# Altium PCB Insole_ver2.PcbDoc (part 3 of 3)
Units mil, origin at the board's own origin, x right, y up, seen from the top; angles counter-clockwise.
Board outline 8634.93 x 10258.5 mil, 2 copper layers (Top Layer, Bottom Layer); 507 components, 50 nets, 1329 pads, 253 vias.
Unrouted connection lines stored in the file: 728.
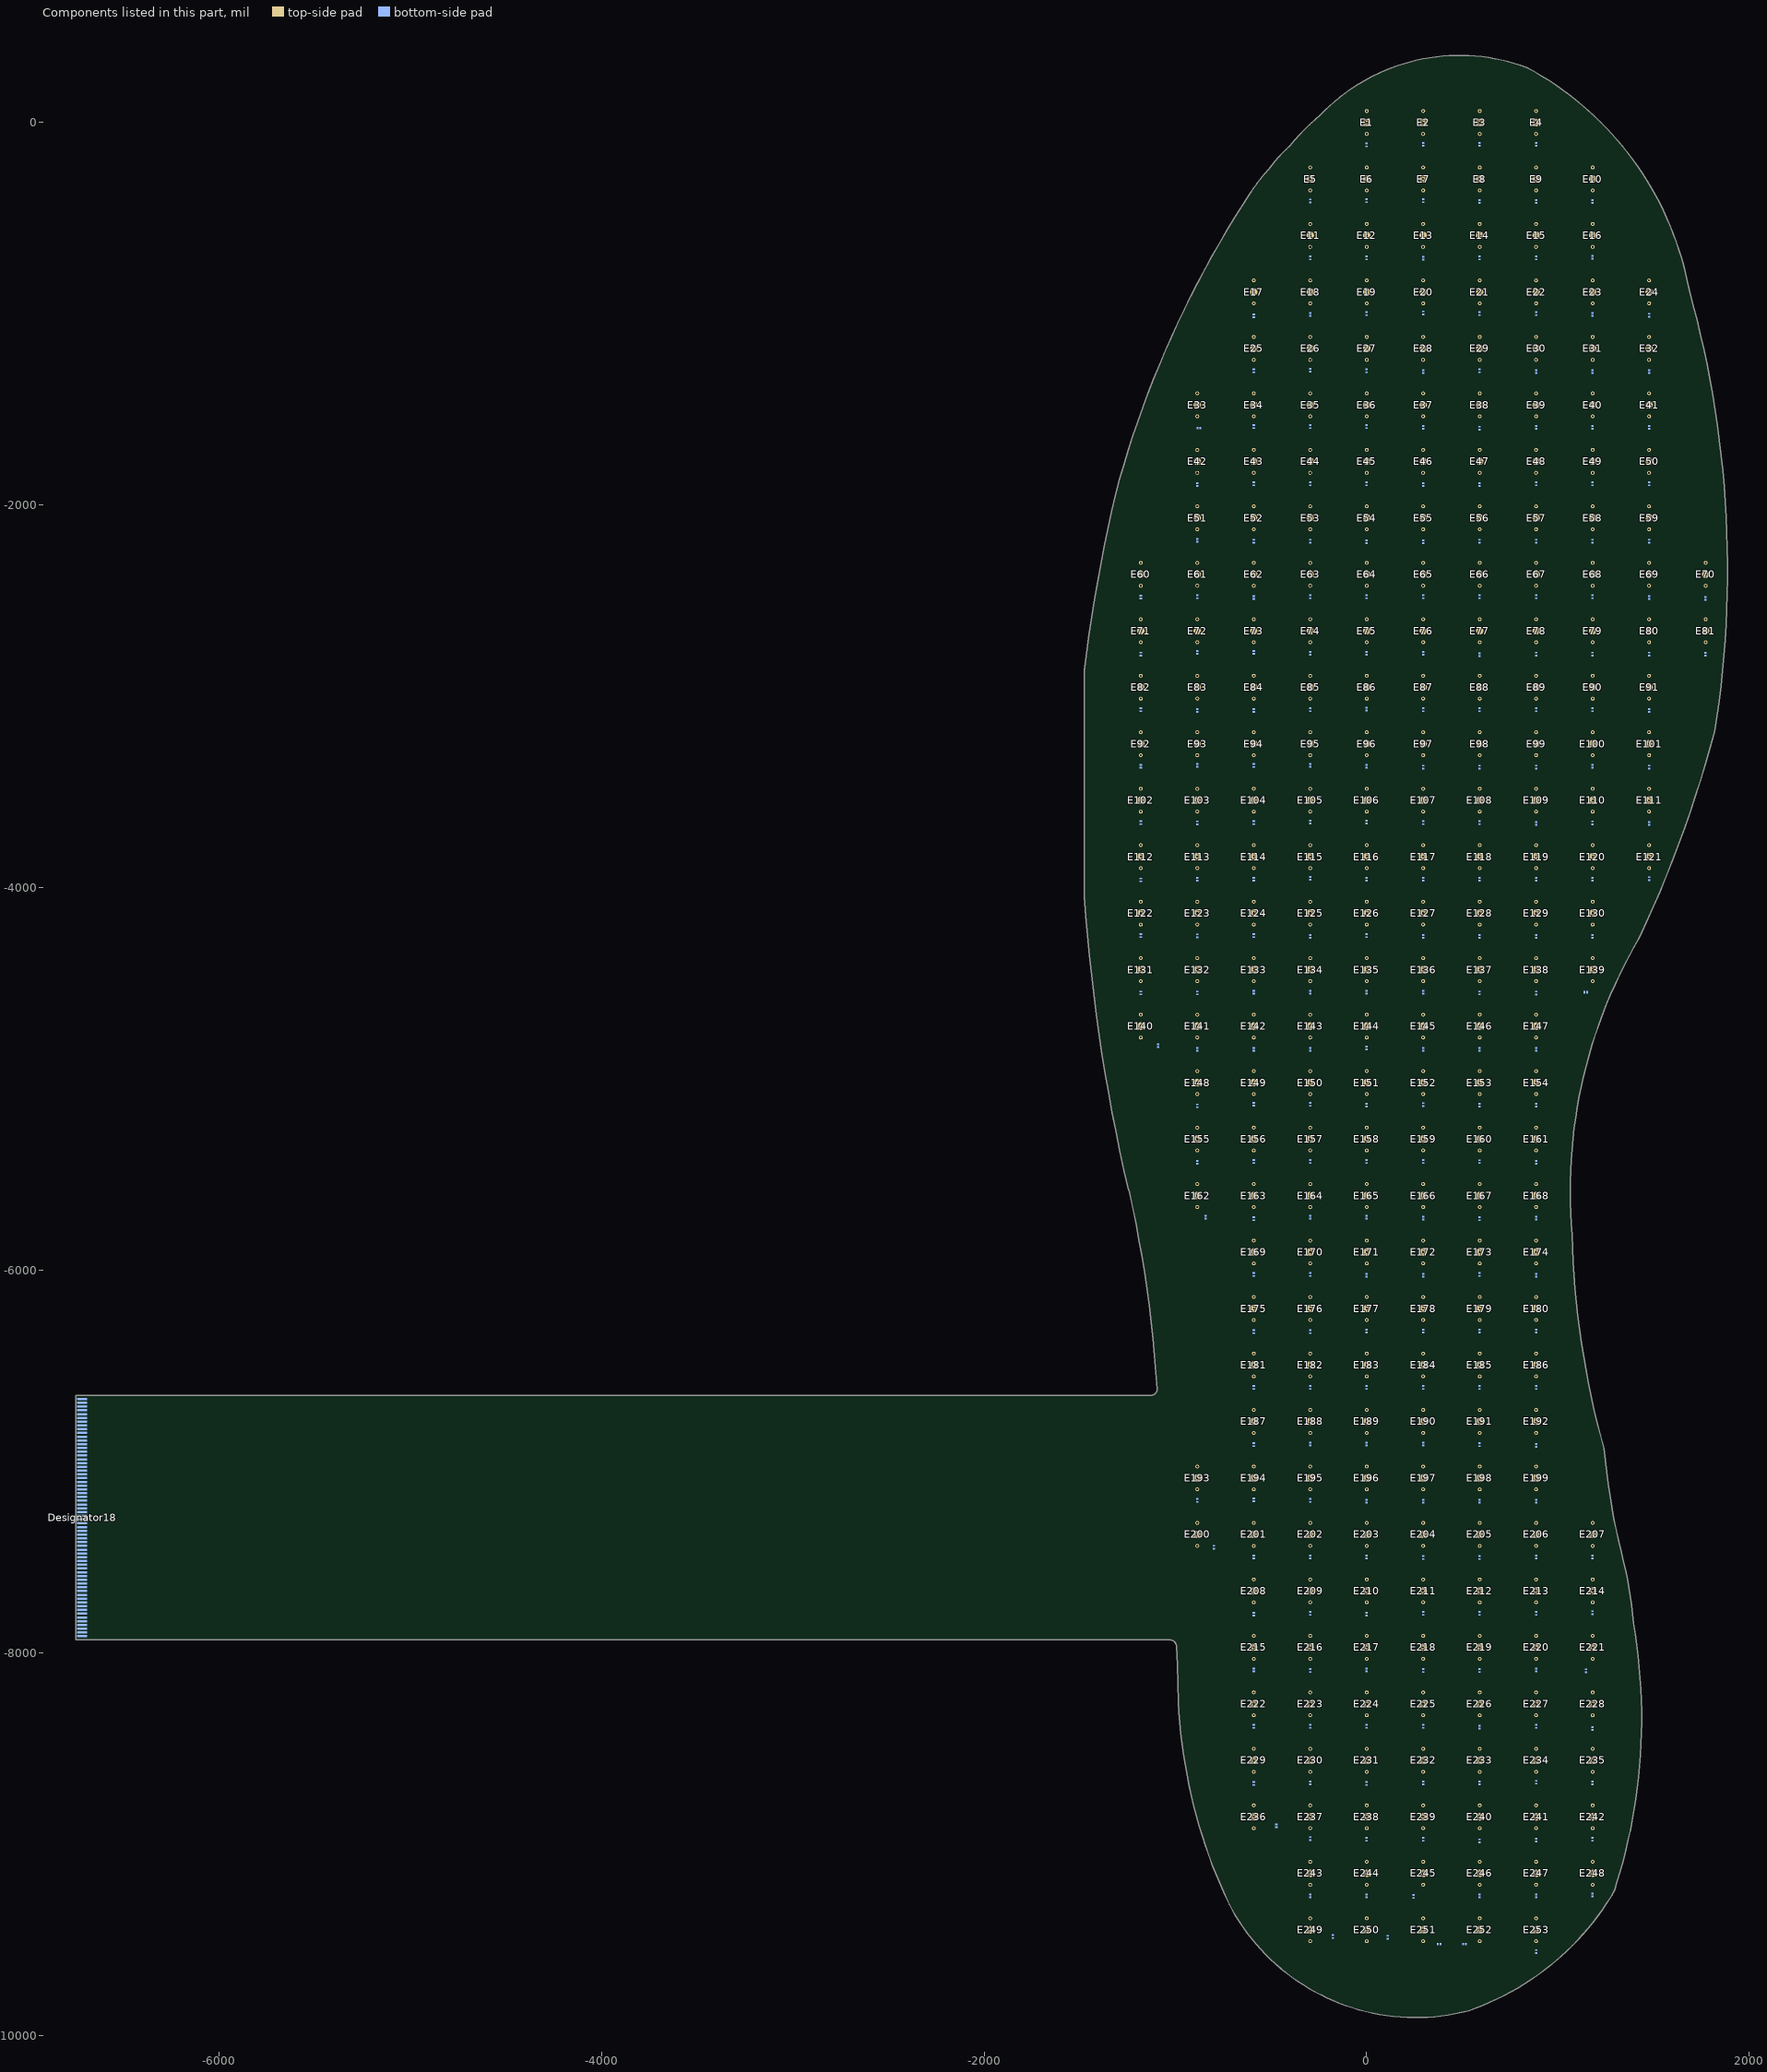
[diagram p3: the components of this part, seen from the top]

## Via types
v1: diameter 19.68, hole 9.84, Top Layer to Bottom Layer, tented both sides, 252 vias
v2: diameter 23.62, hole 9.84, Top Layer to Bottom Layer, tented both sides, 1 vias

## Nets (pads, with @x,y where several pads share a name; then routed paths per layer and width w, separated by ;. In a path a pad name is that pad's centre, name@x,y a point inside that pad or via, vN(x,y) a via of type N, cw(c..) or ccw(c..) an arc to the next point about the centre after c; other vN are vias at no path point) (continued)
pads on no net: D?1.1 D?2.1 D?3.1 D?4.1 D?4.2 D?5.1 D?6.1 D?7.1 D?8.1 D?9.1 D?10.1 D?10.2 D?11.1 D?11.2 D?12.1 D?12.2 D?13.1 D?13.2 D?14.1 D?14.2 D?15.1 D?16.1 D?17.1 D?17.2 D?18.1 D?18.2 D?19.1 D?19.2 D?20.1 D?21.1 D?22.1 D?23.1 D?24.1 D?25.1 D?26.1 D?27.1 D?27.2 D?28.1 D?28.2 D?29.1 D?29.2 D?30.1 D?31.1 D?32.1 D?33.1 D?34.1 D?35.1 D?36.1 D?37.1 D?37.2 D?38.1 D?38.2 D?39.1 D?39.2 D?40.1 D?40.2 D?41.1 D?41.2 D?42.1 D?42.2 D?43.1 D?43.2 D?44.1 D?44.2 D?45.1 D?45.2 D?46.1 D?46.2 D?47.1 D?47.2 D?48.1 D?48.2 D?49.1 D?49.2 D?50.1 D?50.2 D?51.1 D?51.2 D?52.1 D?52.2 D?53.1 D?53.2 D?54.1 D?54.2 D?55.1 D?55.2 D?56.1 D?56.2 D?57.1 D?57.2 D?58.1 D?58.2 D?59.1 D?59.2 D?60.1 D?60.2 D?61.1 D?61.2 D?62.1 D?63.1 D?64.1 D?65.1 D?66.1 D?67.1 D?68.1 D?69.1 D?70.1 D?71.1 D?71.2 D?72.1 D?72.2 D?73.1 D?73.2 D?74.1 D?74.2 D?75.1 D?75.2 D?76.1 D?76.2 D?77.1 D?77.2 D?78.1 D?78.2 D?79.1 D?79.2 D?80.1 D?80.2 D?81.1 D?81.2 D?82.1 D?82.2 D?83.1 D?83.2 D?84.1 D?84.2 D?85.1 D?85.2 D?86.1 D?86.2 D?87.1 D?87.2 D?88.1 D?88.2 D?89.1 D?89.2 D?90.1 D?90.2 D?91.1 D?91.2 D?92.1 D?92.2 D?93.1 D?93.2 D?94.1 D?94.2 D?95.1 D?95.2 D?96.1 D?97.1 D?98.1 D?99.1 D?100.1 D?101.1 D?102.1 D?103.1 D?104.1 D?105.1 D?106.1 D?107.1 D?107.2 D?108.1 D?108.2 D?109.1 D?109.2 D?110.1 D?110.2 D?111.1 D?111.2 D?112.1 D?112.2 D?113.1 D?113.2 D?114.1 D?114.2 D?115.1 D?115.2 D?116.1 D?116.2 D?117.1 D?117.2 D?118.1 D?119.1 D?120.1 D?121.1 D?122.1 D?123.1 D?124.1 D?125.1 D?126.1 D?127.1 D?128.1 D?129.1 D?130.1 D?131.1 D?132.1 D?133.1 D?134.1 D?135.1 D?136.1 D?137.1 D?138.1 D?139.1 D?140.1 D?141.1 D?142.1 D?143.1 D?144.1 D?145.1 D?146.1 D?147.1 D?148.1 D?149.1 D?150.1 D?151.1 D?152.1 D?153.1 D?154.1 D?155.1 D?156.1 D?156.2 D?157.1 D?158.1 D?159.1 D?160.1 D?161.1 D?162.1 D?162.2 D?163.1 D?163.2 D?164.1 D?164.2 D?165.1 D?166.1 D?166.2 D?167.1 D?167.2 D?168.1 D?168.2 D?169.1 D?169.2 D?170.1 D?170.2 D?171.1 D?171.2 D?172.1 D?172.2 D?173.1 D?173.2 D?174.1 D?174.2 D?175.1 D?175.2 D?176.1 D?176.2 D?177.1 D?177.2 D?178.1 D?178.2 D?179.1 D?179.2 D?180.1 D?181.1 D?181.2 D?182.1 D?182.2 D?183.1 D?183.2 D?184.1 D?184.2 D?185.1 D?185.2 D?186.1 D?186.2 D?187.1 D?187.2 D?188.1 D?188.2 D?189.1 D?189.2 D?190.1 D?190.2 D?191.1 D?191.2 D?192.1 D?192.2 D?193.1 D?193.2 D?194.1 D?194.2 D?195.1 D?195.2 D?196.1 D?196.2 D?197.1 D?197.2 D?198.1 D?198.2 D?199.1 D?199.2 D?200.1 D?200.2 D?201.1 D?201.2 D?202.1 D?202.2 D?203.1 D?203.2 D?204.1 D?204.2 D?205.1 D?205.2 D?206.1 D?206.2 D?207.1 D?207.2 D?208.1 D?208.2 D?209.1 D?209.2 D?210.1 D?210.2 D?211.1 D?211.2 D?212.1 D?212.2 D?213.1 D?213.2 D?214.1 D?214.2 D?215.1 D?215.2 D?216.1 D?216.2 D?217.1 D?217.2 D?218.1 D?218.2 D?219.1 D?220.1 D?221.1 D?222.1 D?222.2 D?223.1 D?224.1 D?224.2 D?225.1 D?225.2 D?226.1 D?226.2 D?227.1 D?227.2 D?228.1 D?228.2 D?229.1 D?229.2 D?230.1 D?230.2 D?231.1 D?231.2 D?232.1 D?232.2 D?233.1 D?233.2 D?234.1 D?234.2 D?235.1 D?235.2 D?236.1 D?236.2 D?237.1 D?237.2 D?238.1 D?238.2 D?239.1 D?239.2 D?240.1 D?240.2 D?241.1 D?241.2 D?242.1 D?242.2 D?243.1 D?243.2 D?244.1 D?244.2 D?245.1 D?245.2 D?246.1 D?246.2 D?247.1 D?247.2 D?248.1 D?248.2 D?249.1 D?249.2 D?250.1 D?250.2 D?251.1 D?251.2 D?252.1 D?252.2 D?.1 Designator18.43 Designator18.44 Designator18.45 Designator18.46 Designator18.47 Designator18.48 Designator18.49 Designator18.50 Designator18.51 Designator18.52 Designator18.53 Designator18.54 Designator18.55 Designator18.56 Designator18.57 Designator18.58 Designator18.59 Designator18.60 Designator18.61 Designator18.62 Designator18.63 Designator18.64
copper on no net: | length 120024.5
  Top Layer w9: v1@-779.53,-2488.68 v1(-779.53,-2779.53) v1(-779.53,-3082.68) v1(-779.53,-3370.08) v1(-779.53,-3669.29) v1(-779.53,-3964.57) v1(-779.53,-4259.84) -779.53,-4554.63 v1(-780.02,-4555.12) v1(-484.25,-4555.12) v1(-484.25,-4854.33) v1(-484.25,-5141.73) v1(-484.25,-5440.94) v1(-188.98,-5440.94) v1(-188.98,-5732.28) v1(-188.98,-6031.5) v1(-188.98,-6330.71) -295.28,-6330.71 -429.13,-6464.57 -429.13,-6870.08 v1(-480.32,-6921.26) v1(-480.32,-7208.66) v1(-188.98,-7208.66) v1(-188.98,-7507.87) v1(-188.98,-7803.15) v1(-188.98,-8102.36) v1(-188.98,-8393.7) v1(-188.98,-8688.98) 106.3,-8688.98 v1(110.24,-8692.91) v1(110.24,-8984.25) v1(110.24,-9279.53) 161.42,-9330.71 v1(177.17,-9330.71) ; v1(-779.53,-2488.19) v1(-779.53,-2192.91) -720.47,-2133.86 -720.47,-1736.22 -582.68,-1598.43 v1(-476.38,-1598.43) -476.38,-1332.99 v1(-476.38,-1307.09) -476.38,-633.86 v1(-295.28,-452.76) ; v1(-771.65,-1598.43) -771.65,-1822.83 v1(-885.83,-1937.01) -917.32,-1937.01 -1070.87,-2090.55 v1(-1070.87,-2488.19) v1(-1070.87,-2787.4) v1(-1070.87,-3078.74) v1(-1070.87,-3374.02) v1(-1070.87,-3665.35) v1(-1070.87,-3968.5) v1(-1070.87,-4259.84) v1(-1070.87,-4559.06) -1047.24,-4582.68 v1(-1047.24,-4834.65) -791.34,-4834.65 v1(-771.65,-4854.33) v1(-771.65,-5149.61) v1(-771.65,-5444.88) v1(-771.65,-5736.22) -484.25,-5736.22 v1(-480.32,-5740.16) v1(-480.32,-6031.5) v1(-480.32,-6330.71) -480.32,-6543.31 v1(-590.55,-6653.54) -779.53,-6842.52 v1(-779.53,-7212.6) -779.53,-7427.47 v1(-751,-7456) -699.13,-7507.87 v2(-480.32,-7507.87) v1(-480.32,-7807.09) -480.32,-7832.99 v1(-480.32,-8098.43) v1(-480.32,-8393.7) v1(-480.32,-8692.91) -480.32,-8866.14 v1(-433.07,-8913.39) -362.2,-8984.25 v1(-188.98,-8984.25) -185.04,-8988.19 v1(-185.04,-9279.53) -141.73,-9322.83 v1(-141.73,-9492.13) -86.61,-9547.24 98.43,-9547.24 v1(149.61,-9496.06) ; v1@-771.65,-1597.94 -771.65,-1208.66 -610.24,-1047.24 v1(-590.55,-1047.24) ; v1(-185.04,-716.54) v1(-185.04,-1011.81) -185.04,-1259.84 -259.84,-1334.65 v1(-295.28,-1334.65) -425.2,-1464.57 -425.2,-1850.39 v1(-476.38,-1901.57) v1(-476.38,-2196.85) v1(-476.38,-2492.13) v1(-476.38,-2779.53) v1(-476.38,-3082.68) v1(-476.38,-3370.08) v1(-476.38,-3669.29) v1(-476.38,-3964.57) v1(-476.38,-4259.84) -475.89,-4259.84 -471.95,-4263.78 v1(-185.04,-4263.78) v1(-185.04,-4555.12) v1(-185.04,-4854.33) v1(-185.04,-5141.73) 109.75,-5141.73 113.68,-5145.67 v1(114.17,-5145.67) v1(114.17,-5440.94) v1(114.17,-5732.28) 114.17,-5984.25 31.5,-6066.93 v1(0,-6066.93) -15.75,-6066.93 -133.86,-6185.04 -133.86,-6570.87 v1(-185.04,-6622.05) -185.04,-6915.4 -179.18,-6921.26 92.57,-6921.26 v1@95.5,-6924.19 ; v1(0,-157.48) 59.06,-157.48 157.48,-255.91 157.48,-346.46 259.84,-448.82 v1(295.28,-448.82) 381.89,-448.82 409.45,-476.38 409.45,-681.1 334.65,-755.91 v1(295.28,-755.91) 240.16,-755.91 165.35,-830.71 165.35,-1251.97 v1(110.24,-1307.09) v1(110.24,-1598.43) v1(110.24,-1897.64) v1(110.24,-2200.79) v1(110.24,-2488.19) v1(110.24,-2783.46) v1(110.24,-3074.8) v1(110.24,-3374.02) v1(110.24,-3669.29) v1(413.39,-3669.29) v1(413.39,-3964.57) v1(413.39,-4263.78) v1(413.39,-4559.06) v1(704.72,-4559.06) 704.72,-4828.43 v1(704.72,-4854.33) ; v1@97.83,-6921.85 98.18,-6921.85 98.43,-6922.1 v1(98.43,-7216.54) v1(98.43,-7507.87) v1(98.43,-7807.09) v1(98.43,-8098.43) 98.43,-8391.78 102.02,-8395.37 102.02,-8396.8 102.85,-8397.64 v1@103.2,-8397.64 ; v1@104.28,-8397.64 387.84,-8397.64 v1@393.7,-8403.5 ; v1(110.24,-417.32) v1(110.24,-716.54) 110.24,-964.57 31.5,-1043.31 v1(0,-1043.31) -114.17,-1157.48 -114.17,-1334.65 -181.1,-1401.57 v1(-181.1,-1598.43) v1(-181.1,-1897.64) v1(-181.1,-2196.85) v1(-181.1,-2488.19) v1(-181.1,-2783.46) v1(-181.1,-3078.74) v1(-181.1,-3370.08) v1(-181.1,-3665.35) v1(-181.1,-3964.57) 114.17,-3964.57 v1(118.11,-3968.5) v1(118.11,-4259.84) v1(118.11,-4555.12) v1(118.11,-4850.39) 371.73,-4850.39 401.08,-4850.39 405.02,-4854.33 v1(405.51,-4854.33) ; v1(295.28,-157.48) v1(590.55,-157.48) 700.79,-267.72 700.79,-342.52 v1(590.55,-452.76) 562.99,-452.76 464.57,-551.18 464.57,-948.82 v1(409.45,-1003.94) v1(409.45,-1311.02) v1(409.45,-1602.36) v1(409.45,-1901.57) v1(409.45,-2200.79) v1(409.45,-2488.19) v1(409.45,-2783.46) v1(409.45,-3078.74) 409.45,-3104.65 v1(409.45,-3377.95) v1(704.72,-3377.95) v1(704.72,-3669.29) v1(704.72,-3964.57) v1(704.72,-4263.78) v1(1007.87,-4263.78) v1(1007.87,-4555.12) v1(1007.87,-4854.33) 984.25,-4877.95 984.25,-5086.61 v1(885.83,-5185.04) 858.27,-5185.04 748.03,-5295.28 748.03,-5696.85 v1(700.79,-5744.09) v1(700.79,-6031.5) 842.52,-6031.5 v1(885.83,-6074.8) 917.32,-6074.8 992.13,-6149.61 v1(992.13,-6334.65) v1(992.13,-6622.05) v1(992.13,-6925.2) v1(992.13,-7216.54) v1(992.13,-7507.87) ; v1@393.7,-8402.41 v1(393.7,-8688.98) v1(393.7,-8984.25) 393.7,-9358.27 440.94,-9405.51 v1(440.94,-9519.68) ; v1@405.17,-5140.9 v1@405.17,-4854.68 ; v1@405.51,-5441.44 405.51,-5657.48 v1(295.28,-5767.72) 275.59,-5767.72 192.91,-5850.39 192.91,-6070.87 118.11,-6145.67 v1(118.11,-6326.77) v1(118.11,-6625.98) v1(409.45,-6625.98) v1(409.45,-6917.32) v1(409.45,-7216.54) v1(409.45,-7511.81) v1(409.45,-7803.15) v1(409.45,-8098.43) 413.39,-8102.36 v1(700.79,-8102.36) v1(700.79,-8397.64) v1(700.79,-8688.98) 543.31,-8688.98 440.94,-8791.34 440.94,-9318.9 476.38,-9354.33 v1(476.38,-9559.06) ; v1(405.51,-5440.94) v1(405.51,-5141.73) ; v1(590.55,-9311.02) 519.69,-9311.02 480.31,-9271.65 480.31,-8814.96 543.31,-8751.97 732.28,-8751.97 740.16,-8744.09 740.16,-8503.94 814.96,-8429.13 v1(885.83,-8429.13) 940.94,-8429.13 988.19,-8381.89 v1(988.19,-8098.43) 988.19,-7812.94 v1@985.26,-7810.02 ; v1(590.55,-9027.56) 771.65,-8846.46 771.65,-8519.69 830.71,-8460.63 992.13,-8460.63 1066.93,-8385.83 1066.93,-8161.42 v1(1102.36,-8125.98) 1055.12,-8078.74 1055.12,-7913.39 1129.92,-7838.58 v1(1181.1,-7838.58) 992.13,-7649.61 v1(992.13,-7507.87) ; v1@704.72,-4854.82 v1(704.72,-5145.67) 704.72,-5425.2 653.54,-5476.38 v1(590.55,-5476.38) 570.87,-5476.38 464.57,-5582.68 464.57,-5688.98 417.32,-5736.22 v1(417.32,-6035.43) v1(417.32,-6326.77) v1(700.79,-6326.77) 700.79,-6330.71 v1(700.79,-6622.05) v1(700.79,-6921.26) v1(700.79,-7216.54) v1(700.79,-7511.81) v1(700.79,-7807.09) 987.35,-7807.09 987.6,-7807.33 v1@987.6,-7807.68 ; v1@708.66,-2787.89 v1(708.66,-3078.74) v1(1000,-3078.74) v1(1000,-3377.95) v1(1000,-3673.23) ; v1(708.66,-2787.4) v1@708.66,-2492.62 ; v1(708.66,-2492.13) v1(708.66,-2196.85) v1(708.66,-1897.64) 709.01,-1897.29 709.01,-1606.65 v1(708.66,-1606.3) v1(708.66,-1307.09) 709.01,-1306.74 709.01,-1008.22 v1(708.66,-1007.87) v1(708.66,-712.6) 759.84,-661.42 759.84,-267.72 870.08,-157.48 v1(885.83,-157.48) ; v1(885.83,-9314.96) 1011.81,-9188.98 1011.81,-9133.86 1125.98,-9019.69 v1(1181.1,-9019.69) ; v1(885.83,-8724.41) 992.13,-8618.11 992.13,-8551.18 1110.24,-8433.07 v1(1181.1,-8433.07) ; v1(885.83,-5775.59) 862.2,-5775.59 787.4,-5700.79 787.4,-5547.24 846.46,-5488.19 v1(885.83,-5488.19) 988.19,-5385.83 988.19,-5137.8 1051.18,-5074.8 1051.18,-4649.61 1086.61,-4614.17 v1(1086.61,-4586.61) 1062.99,-4562.99 1062.99,-4370.08 1133.86,-4299.21 v1(1181.1,-4299.21) 1200.79,-4299.21 1297.24,-4202.76 v1(1297.24,-3966.54) 1296.75,-3966.54 1294.79,-3964.57 1271.34,-3964.57 v1(1000,-3964.57) 1000,-3938.66 v1@1000,-3673.72 ; v1@886.17,-9023.28 1180.76,-8728.69 1180.76,-8724.76 v1(1181.1,-8724.41) ; v1(996.06,-2787.4) v1(1291.34,-2787.4) 1291.34,-3056.77 v1(1291.34,-3082.68) ; v1@996.06,-2786.91 v1(996.06,-2488.19) v1(996.06,-2196.85) v1(996.06,-1899.61) ; v1(996.06,-421.26) v1(996.06,-716.54) v1(996.06,-1012.06) v1(996.06,-1311.02) v1(996.06,-1598.43) 996.41,-1598.77 v1@996.41,-1899.26 ; v1(1181.1,-7547.24) 1031.5,-7547.24 v1(992.13,-7507.87) ; v1@1291.34,-3083.51 v1(1291.34,-3377.95) v1(1291.34,-3669.29) ; v1@1303.15,-1894.19 1303.15,-1919.61 v1(1303.15,-2188.98) v1(1303.15,-2484.25) 1586.12,-2484.25 1590.06,-2488.19 v1(1590.55,-2488.19) v1(1590.55,-2787.4) v1(1590.55,-3078.74) v1(1590.55,-3374.02) ; v1(1303.15,-1893.7) v1(1303.15,-1598.43) v1(1303.15,-1311.02) 1303.15,-1033.78 v1(1303.15,-1007.87) v1(1303.15,-712.6) v1(1303.15,-421.26) ; v1(1421.26,-3984.25) 1291.34,-3854.33 v1(1291.34,-3669.29) ; v1(1476.38,-3712.6) 1334.65,-3712.6 v1(1291.34,-3669.29) ; v1(1590.55,-1015.75) v1(1590.55,-1314.96) v1(1590.55,-1610.24) v1(1590.55,-1905.51) v1(1590.55,-2200.79) 1590.55,-2421.26 1700.79,-2531.5 v1(1771.65,-2531.5) ; 1661.42,-2492.13 1661.42,-2728.35 v1(1771.65,-2838.58)
  Bottom Layer w9: -1181.1,-4558.27 -1072.14,-4558.27 -1071.36,-4559.06 v1(-1070.87,-4559.06) ; -1181.1,-4259.06 -1096.77,-4259.06 -1080.02,-4259.06 -1079.58,-4259.5 -1071.21,-4259.5 v1(-1070.87,-4259.84) ; -1181.1,-3967.72 -1072.14,-3967.72 -1071.36,-3968.5 v1(-1070.87,-3968.5) ; -1181.1,-3668.5 -1074.51,-3668.5 -1071.36,-3665.35 v1(-1070.87,-3665.35) ; -1181.1,-3373.23 -1072.14,-3373.23 -1071.36,-3374.02 v1(-1070.87,-3374.02) ; -1181.1,-3077.95 -1096.77,-3077.95 -1080.02,-3077.95 -1079.58,-3078.39 -1071.21,-3078.39 v1(-1070.87,-3078.74) ; -1181.1,-2786.61 -1072.14,-2786.61 -1071.36,-2787.4 v1(-1070.87,-2787.4) ; -1181.1,-2488.19 v1(-1070.87,-2488.19) ; -1090.55,-4833.86 -1048.52,-4833.86 -1047.73,-4834.65 v1(-1047.24,-4834.65) ; -885.83,-7211.81 -780.81,-7211.81 -780.02,-7212.6 v1(-779.53,-7212.6) ; -885.83,-5444.09 -797.56,-5444.09 -780.81,-5444.09 -780.36,-5444.54 -772,-5444.54 v1(-771.65,-5444.88) ; -885.83,-5148.82 -772.93,-5148.82 -772.14,-5149.61 v1(-771.65,-5149.61) ; -885.83,-4853.54 -797.56,-4853.54 -780.81,-4853.54 -780.36,-4853.98 -772,-4853.98 v1(-771.65,-4854.33) ; -885.83,-4558.27 -783.17,-4558.27 v1(-780.02,-4555.12) ; -885.83,-4259.84 v1(-779.53,-4259.84) ; -885.83,-3963.78 -780.32,-3963.78 v1(-779.53,-3964.57) ; -885.83,-3669.29 v1(-779.53,-3669.29) ; -885.83,-3369.29 -780.32,-3369.29 v1(-779.53,-3370.08) ; -885.83,-3081.89 -780.81,-3081.89 -780.02,-3082.68 v1(-779.53,-3082.68) ; -885.83,-2778.74 -780.81,-2778.74 -780.02,-2779.53 v1(-779.53,-2779.53) ; -885.83,-2487.4 -780.81,-2487.4 -780.02,-2488.19 v1(-779.53,-2488.19) ; -885.83,-2192.13 -780.81,-2192.13 -780.02,-2192.91 v1(-779.53,-2192.91) ; v1(-885.83,-1937.01) -885.83,-1900.79 ; -870.08,-1598.43 v1(-771.65,-1598.43) ; -841.42,-5731.97 -837.17,-5736.22 v1(-771.65,-5736.22) ; -799.21,-7455.91 v1@-751.09,-7455.91 ; -590.55,-8692.13 -481.59,-8692.13 -480.81,-8692.91 v1(-480.32,-8692.91) ; -590.55,-8392.91 -481.1,-8392.91 v1(-480.32,-8393.7) ; -590.55,-8097.64 -590.08,-8098.11 -585.85,-8098.11 -585.54,-8098.43 v1(-480.32,-8098.43) ; -590.55,-7806.3 -481.1,-7806.3 v1(-480.32,-7807.09) ; -590.55,-7507.09 -481.59,-7507.09 -480.81,-7507.87 v2(-480.32,-7507.87) ; -590.55,-7208.66 v1(-480.32,-7208.66) ; -590.55,-6920.47 -481.1,-6920.47 v1(-480.32,-6921.26) ; v1(-590.55,-6653.54) -590.55,-6621.26 ; -590.55,-6329.92 -481.59,-6329.92 -480.81,-6330.71 v1(-480.32,-6330.71) ; -590.55,-6030.71 -481.59,-6030.71 -480.81,-6031.5 v1(-480.32,-6031.5) ; -590.55,-5739.37 -506.22,-5739.37 -485.53,-5739.37 -485.09,-5739.81 -480.66,-5739.81 v1(-480.32,-5740.16) ; -590.55,-5440.16 -485.04,-5440.16 v1(-484.25,-5440.94) ; -590.55,-5140.94 -485.53,-5140.94 -484.74,-5141.73 v1(-484.25,-5141.73) ; -590.55,-4853.54 -485.53,-4853.54 -484.74,-4854.33 v1(-484.25,-4854.33) ; -590.55,-4554.33 -485.53,-4554.33 -484.74,-4555.12 v1(-484.25,-4555.12) ; -590.55,-4259.06 -477.66,-4259.06 -476.87,-4259.84 v1(-476.38,-4259.84) ; -590.55,-3963.78 -477.66,-3963.78 -476.87,-3964.57 v1(-476.38,-3964.57) ; -590.55,-3668.5 -477.17,-3668.5 v1(-476.38,-3669.29) ; -590.55,-3369.69 -476.77,-3369.69 v1(-476.38,-3370.08) ; -590.55,-3081.89 -477.17,-3081.89 v1(-476.38,-3082.68) ; -590.55,-2778.74 -477.17,-2778.74 v1(-476.38,-2779.53) ; -590.55,-2491.34 -477.17,-2491.34 v1(-476.38,-2492.13) ; -590.55,-2196.06 -477.17,-2196.06 v1(-476.38,-2196.85) ; -590.55,-1896.85 -481.1,-1896.85 v1(-476.38,-1901.57) ; -590.55,-1597.64 -477.17,-1597.64 v1(-476.38,-1598.43) ; -590.55,-1306.3 -477.17,-1306.3 v1(-476.38,-1307.09) ; v1(-590.55,-1047.24) -590.55,-1018.9 ; -472.44,-8912.6 -434.35,-8912.6 -433.56,-8913.39 v1(-433.07,-8913.39) ; -295.28,-9278.74 -210.95,-9278.74 -194.19,-9278.74 -193.75,-9279.18 -185.39,-9279.18 v1(-185.04,-9279.53) ; -295.28,-8979.53 -194.19,-8979.53 -189.47,-8984.25 v1(-188.98,-8984.25) ; -295.28,-8688.19 -189.76,-8688.19 v1(-188.98,-8688.98) ; -295.28,-8392.91 -189.76,-8392.91 v1(-188.98,-8393.7) ; -295.28,-8101.57 -189.76,-8101.57 v1(-188.98,-8102.36) ; -295.28,-7802.36 -189.76,-7802.36 v1(-188.98,-7803.15) ; -295.28,-7507.09 -190.25,-7507.09 -189.47,-7507.87 v1(-188.98,-7507.87) ; -295.28,-7211.81 -192.13,-7211.81 v1(-188.98,-7208.66) ; -295.28,-6916.54 -185.83,-6916.54 v1(-185.04,-6917.32) ; -295.28,-6621.26 -185.83,-6621.26 v1(-185.04,-6622.05) ; -295.28,-6329.92 -189.76,-6329.92 v1(-188.98,-6330.71) ; -295.28,-6030.71 -189.76,-6030.71 v1(-188.98,-6031.5) ; -295.28,-5731.5 -189.76,-5731.5 v1(-188.98,-5732.28) ; -295.28,-5440.16 -189.76,-5440.16 v1(-188.98,-5440.94) ; -295.28,-5141.34 -185.43,-5141.34 v1(-185.04,-5141.73) ; -295.28,-4853.54 -185.83,-4853.54 v1(-185.04,-4854.33) ; -295.28,-4554.33 -186.32,-4554.33 -185.53,-4555.12 v1(-185.04,-4555.12) ; -295.28,-4262.99 -185.83,-4262.99 v1(-185.04,-4263.78) ; -295.28,-3959.84 -294.65,-3959.84 -289.92,-3964.57 v1(-181.1,-3964.57) ; -295.28,-3664.57 -181.89,-3664.57 v1(-181.1,-3665.35) ; -295.28,-3369.29 -182.38,-3369.29 -181.59,-3370.08 v1(-181.1,-3370.08) ; -295.28,-3077.95 -182.38,-3077.95 -181.59,-3078.74 v1(-181.1,-3078.74) ; -295.28,-2782.68 -181.89,-2782.68 v1(-181.1,-2783.46) ; -295.28,-2487.4 -181.89,-2487.4 v1(-181.1,-2488.19) ; -295.28,-2196.06 -181.89,-2196.06 v1(-181.1,-2196.85) ; -295.28,-1896.85 -181.89,-1896.85 v1(-181.1,-1897.64) ; -295.28,-1597.64 -182.38,-1597.64 -181.59,-1598.43 v1(-181.1,-1598.43) ; v1(-295.28,-1334.65) -295.28,-1302.36 ; -295.28,-1011.02 -185.83,-1011.02 v1(-185.04,-1011.81) ; -295.28,-715.75 -185.83,-715.75 v1(-185.04,-716.54) ; v1(-295.28,-452.76) -295.28,-417.32 ; -177.17,-9492.13 v1(-141.73,-9492.13) ; 0,-9278.74 109.45,-9278.74 v1(110.24,-9279.53) ; 0,-8983.46 109.45,-8983.46 v1(110.24,-8984.25) ; 0,-8692.13 108.96,-8692.13 109.75,-8692.91 v1(110.24,-8692.91) ; 0,-8392.91 97.64,-8392.91 v1(102.36,-8397.64) ; 0,-8098.43 v1(98.43,-8098.43) ; 0,-7806.3 97.64,-7806.3 v1(98.43,-7807.09) ; 0,-7507.09 97.64,-7507.09 v1(98.43,-7507.87) ; 0,-7215.75 97.15,-7215.75 97.94,-7216.54 v1(98.43,-7216.54) ; 0,-6916.54 93.7,-6916.54 v1(98.43,-6921.26) ; 0,-6621.26 113.39,-6621.26 v1(118.11,-6625.98) ; 0,-6325.98 116.83,-6325.98 117.62,-6326.77 v1(118.11,-6326.77) ; v1(0,-6066.93) 0,-6035.04 ; 0,-5731.5 113.39,-5731.5 v1(114.17,-5732.28) ; 0,-5440.16 112.9,-5440.16 113.68,-5440.94 v1(114.17,-5440.94) ; 0,-5144.88 112.9,-5144.88 113.68,-5145.67 v1(114.17,-5145.67) ; 0,-4846.46 0.63,-4846.46 4.57,-4850.39 v1(118.11,-4850.39) ; 0,-4554.33 117.32,-4554.33 v1(118.11,-4555.12) ; 0,-4259.06 117.32,-4259.06 v1(118.11,-4259.84) ; 0,-3963.78 113.39,-3963.78 v1(118.11,-3968.5) ; 0,-3664.57 0.63,-3664.57 5.35,-3669.29 v1(110.24,-3669.29) ; 0,-3373.23 108.96,-3373.23 109.75,-3374.02 v1(110.24,-3374.02) ; 0,-3074.02 108.96,-3074.02 109.75,-3074.8 v1(110.24,-3074.8) ; 0,-2782.68 109.45,-2782.68 v1(110.24,-2783.46) ; 0,-2487.4 109.45,-2487.4 v1(110.24,-2488.19) ; 0,-2200 108.96,-2200 109.75,-2200.79 v1(110.24,-2200.79) ; 0,-1896.85 108.96,-1896.85 109.75,-1897.64 v1(110.24,-1897.64) ; 0,-1597.64 109.45,-1597.64 v1(110.24,-1598.43) ; 0,-1306.3 108.96,-1306.3 109.75,-1307.09 v1(110.24,-1307.09) ; v1(0,-1043.31) 0,-1007.09 ; 0,-715.75 109.45,-715.75 v1(110.24,-716.54) ; 0,-416.54 109.45,-416.54 v1(110.24,-417.32) ; v1(0,-157.48) 0,-125.2 ; 294.74,-6621.52 404.98,-6621.52 v1(409.45,-6625.98) ; 295.28,-8983.46 v1@392.91,-8983.46 ; 295.28,-8688.19 392.91,-8688.19 v1(393.7,-8688.98) ; 295.28,-8392.91 385.04,-8392.91 v1(393.7,-8401.57) ; 295.28,-8101.57 383.54,-8101.57 396.36,-8101.57 396.55,-8101.76 405.62,-8101.76 408.96,-8098.43 v1(409.45,-8098.43) ; 295.28,-7802.36 408.66,-7802.36 v1(409.45,-7803.15) ; 295.28,-7511.02 408.66,-7511.02 v1(409.45,-7511.81) ; 295.28,-7215.75 408.17,-7215.75 408.96,-7216.54 v1(409.45,-7216.54) ; 295.28,-6916.54 408.17,-6916.54 408.96,-6917.32 v1(409.45,-6917.32) ; 295.28,-6325.98 416.54,-6325.98 v1(417.32,-6326.77) ; 295.28,-6034.65 416.54,-6034.65 v1(417.32,-6035.43) ; v1(295.28,-5767.72) 295.28,-5736.22 ; 295.28,-5440.16 404.72,-5440.16 v1(405.51,-5440.94) ; 295.28,-5141.73 v1(405.51,-5141.73) ; 295.28,-4853.54 404.72,-4853.54 v1(405.51,-4854.33) ; 295.28,-4554.72 295.91,-4554.72 300.24,-4559.06 v1(413.39,-4559.06) ; 295.28,-4262.99 412.6,-4262.99 v1(413.39,-4263.78) ; 295.28,-3963.78 412.6,-3963.78 v1(413.39,-3964.57) ; 295.28,-3668.5 412.6,-3668.5 v1(413.39,-3669.29) ; 295.28,-3377.17 408.66,-3377.17 v1(409.45,-3377.95) ; 295.28,-3077.95 408.66,-3077.95 v1(409.45,-3078.74) ; 295.28,-2783.07 408.56,-2783.07 408.96,-2783.46 v1(409.45,-2783.46) ; 295.28,-2487.4 408.17,-2487.4 408.96,-2488.19 v1(409.45,-2488.19) ; 295.28,-2200 408.66,-2200 v1(409.45,-2200.79) ; 295.28,-1900.79 408.66,-1900.79 v1(409.45,-1901.57) ; 295.28,-1601.57 408.66,-1601.57 v1(409.45,-1602.36) ; 295.28,-1310.24 408.66,-1310.24 v1(409.45,-1311.02) ; 295.28,-1003.15 408.17,-1003.15 408.96,-1003.94 v1(409.45,-1003.94) ; v1(295.28,-755.91) 295.28,-716.54 ; v1(295.28,-448.82) 295.28,-416.54 ; v1(295.28,-157.48) 295.28,-121.26 ; 590.55,-8688.19 700,-8688.19 v1(700.79,-8688.98) ; 590.55,-8396.85 699.51,-8396.85 700.3,-8397.64 v1(700.79,-8397.64) ; 590.55,-8101.57 699.51,-8101.57 700.3,-8102.36 v1(700.79,-8102.36) ; 590.55,-7802.36 591.18,-7802.36 595.91,-7807.09 v1(700.79,-7807.09) ; 590.55,-7511.02 700,-7511.02 v1(700.79,-7511.81) ; 590.55,-7215.75 700,-7215.75 v1(700.79,-7216.54) ; 590.55,-6920.47 700,-6920.47 v1(700.79,-6921.26) ; 590.55,-6621.26 v1@700,-6621.26 ; 590.55,-6325.98 700,-6325.98 v1(700.79,-6326.77) ; 590.55,-6030.71 700,-6030.71 v1(700.79,-6031.5) ; 590.55,-5739.37 696.06,-5739.37 v1(700.79,-5744.09) ; v1(590.55,-5476.38) 590.55,-5440.55 ; 590.55,-5144.88 703.94,-5144.88 v1(704.72,-5145.67) ; 590.55,-4853.54 703.94,-4853.54 v1(704.72,-4854.33) ; 590.55,-4558.27 703.94,-4558.27 v1(704.72,-4559.06) ; 590.55,-4262.99 703.94,-4262.99 v1(704.72,-4263.78) ; 590.55,-3963.78 703.45,-3963.78 704.23,-3964.57 v1(704.72,-3964.57) ; 590.55,-3668.5 703.94,-3668.5 v1(704.72,-3669.29) ; 590.55,-3377.17 703.94,-3377.17 v1(704.72,-3377.95) ; 590.55,-3077.95 707.87,-3077.95 v1(708.66,-3078.74) ; 590.55,-2790.55 705.51,-2790.55 v1(708.66,-2787.4) ; 590.55,-2487.4 703.94,-2487.4 v1(708.66,-2492.13) ; 590.55,-2196.06 707.87,-2196.06 v1(708.66,-2196.85) ; 590.55,-1900.79 705.51,-1900.79 v1(708.66,-1897.64) ; 590.55,-1605.51 707.38,-1605.51 708.17,-1606.3 v1(708.66,-1606.3) ; 590.55,-1306.3 707.38,-1306.3 708.17,-1307.09 v1(708.66,-1307.09) ; 590.55,-1007.09 680.39,-1007.09 682.76,-1007.09 703.45,-1007.09 703.89,-1007.53 708.31,-1007.53 v1(708.66,-1007.87) ; 590.55,-715.75 705.51,-715.75 v1(708.66,-712.6) ; v1(590.55,-452.76) 590.55,-420.47 ; v1(590.55,-157.48) 590.55,-121.26 ; v1(885.83,-8429.13) 885.83,-8392.91 ; 885.83,-8098.43 v1(988.19,-8098.43) ; 885.83,-7802.36 886.46,-7802.36 891.18,-7807.09 v1(988.19,-7807.09) ; 885.83,-7507.09 991.34,-7507.09 v1(992.13,-7507.87) ; 885.83,-7215.75 990.85,-7215.75 991.64,-7216.54 v1(992.13,-7216.54) ; 885.83,-6924.41 990.85,-6924.41 991.64,-6925.2 v1(992.13,-6925.2) ; 885.83,-6621.26 990.85,-6621.26 991.64,-6622.05 v1(992.13,-6622.05) ; 885.83,-6325.98 983.46,-6325.98 v1(992.13,-6334.65) ; v1(885.83,-6074.8) 885.83,-6034.65 ; 885.83,-5735.43 v1(885.83,-5775.59) 948.82,-5838.58 948.82,-6232.28 1019.68,-6303.15 1019.68,-7114.17 1220.47,-7314.96 1220.47,-7929.13 1267.72,-7976.38 1267.72,-8389.76 1224.41,-8433.07 v1(1181.1,-8433.07) 1181.1,-8404.72 ; v1(885.83,-5488.19) 885.83,-5444.49 ; v1(885.83,-5185.04) 885.83,-5144.88 ; 885.83,-4853.54 1007.09,-4853.54 v1(1007.87,-4854.33) ; 885.83,-4558.66 1003.84,-4558.66 1007.38,-4555.12 v1(1007.87,-4555.12) ; 885.83,-4262.99 1007.09,-4262.99 v1(1007.87,-4263.78) ; 885.83,-3963.78 999.21,-3963.78 v1(1000,-3964.57) ; 885.83,-3672.44 999.21,-3672.44 v1(1000,-3673.23) ; 885.83,-3377.17 999.21,-3377.17 v1(1000,-3377.95) ; 885.83,-3077.95 999.21,-3077.95 v1(1000,-3078.74) ; 885.83,-2786.61 995.28,-2786.61 v1(996.06,-2787.4) ; 885.83,-2487.4 995.28,-2487.4 v1(996.06,-2488.19) ; 885.83,-2196.06 995.28,-2196.06 v1(996.06,-2196.85) ; 885.83,-1896.85 993.31,-1896.85 v1(996.06,-1899.61) ; 885.83,-1601.57 992.91,-1601.57 v1(996.06,-1598.43) ; 885.83,-1310.24 995.28,-1310.24 v1(996.06,-1311.02) ; 885.83,-1007.09 991.09,-1007.09 v1(996.06,-1012.06) ; 885.83,-715.75 995.28,-715.75 v1(996.06,-716.54) ; 885.83,-420.47 995.28,-420.47 v1(996.06,-421.26) ; v1(885.83,-157.48) 885.83,-121.26 ; v1(1086.61,-4586.61) 1098.43,-4586.61 1136.22,-4548.82 1136.85,-4548.82 1137.8,-4547.87 1137.8,-4547.24 ; v1(1102.36,-8125.98) 1126.38,-8101.97 1145.67,-8101.97 ; 1181.1,-8983.46 v1(1181.1,-9019.69) 1307.09,-8893.7 1307.09,-7956.69 1257,-7906.61 1257,-7296.37 1059.06,-7098.43 1059.06,-6736.22 1059.06,-6279.53 1000,-6220.47 1000,-5094.49 1062.99,-5031.5 1062.99,-4712.6 1251.97,-4523.62 1251.97,-4220.47 1507.87,-3964.57 1507.87,-3763.78 1590.55,-3681.1 v1(1590.55,-3374.02) 1587.4,-3377.17 1476.38,-3377.17 ; 1181.1,-8688.98 v1(1181.1,-8724.41) 1287.4,-8618.11 1287.4,-7968.5 1239,-7920.1 1239,-7305.93 1039.37,-7106.3 1039.37,-6287.4 972.44,-6220.47 972.44,-5074.8 1035.43,-5011.81 1035.43,-4712.6 1232.28,-4515.75 1232.28,-4200.79 1421.26,-4011.81 v1(1421.26,-3984.25) ; v1(1181.1,-7838.58) 1181.1,-7798.43 ; v1(1181.1,-7547.24) 1181.1,-7507.09 ; v1(1181.1,-4299.21) 1181.1,-4262.99 ; 1181.1,-3963.78 1294.49,-3963.78 v1(1297.24,-3966.54) ; 1181.1,-3669.29 v1(1291.34,-3669.29) ; 1181.1,-3373.23 1286.61,-3373.23 v1(1291.34,-3377.95) ; 1181.1,-3077.95 1286.61,-3077.95 v1(1291.34,-3082.68) ; 1181.1,-2786.61 1290.55,-2786.61 v1(1291.34,-2787.4) ; 1181.1,-2487.4 1300,-2487.4 v1(1303.15,-2484.25) ; 1181.1,-2196.06 1296.06,-2196.06 v1(1303.15,-2188.98) ; 1181.1,-1896.85 1300,-1896.85 v1(1303.15,-1893.7) ; 1181.1,-1601.57 1300,-1601.57 v1(1303.15,-1598.43) ; 1181.1,-1310.24 1302.36,-1310.24 v1(1303.15,-1311.02) ; 1181.1,-1011.02 1300,-1011.02 v1(1303.15,-1007.87) ; 1181.1,-711.81 1302.36,-711.81 v1(1303.15,-712.6) ; 1181.1,-420.47 1301.87,-420.47 1302.66,-421.26 v1(1303.15,-421.26) ; v1@1421.75,-3984.25 1445.37,-3960.63 1476.38,-3960.63 ; v1(1476.38,-3712.6) 1476.38,-3672.44 ; 1476.38,-3081.89 1587.4,-3081.89 v1(1590.55,-3078.74) ; 1476.38,-2786.61 1589.76,-2786.61 v1(1590.55,-2787.4) ; 1476.38,-2491.34 1586.91,-2491.34 1590.06,-2488.19 v1(1590.55,-2488.19) ; 1476.38,-2476.38 1476.38,-2422.2 ; 1476.38,-2196.06 1585.83,-2196.06 v1(1590.55,-2200.79) ; 1476.38,-1896.85 1581.89,-1896.85 v1(1590.55,-1905.51) ; 1476.38,-1601.57 1581.89,-1601.57 v1(1590.55,-1610.24) ; 1476.38,-1310.24 1585.83,-1310.24 v1(1590.55,-1314.96) ; 1476.38,-1014.96 1589.76,-1014.96 v1(1590.55,-1015.75) ; v1(1771.65,-2531.5) 1771.65,-2495.67
  other v1: 885.83,-9614.17 885.83,-9023.62

## Silkscreen, mask and mechanical layers (free items; w line width, h text height)
Mechanical 1:
  lines w9: -1244.89,-5582.15 cw(c8166.31,-3378.54) -1476.36,-4045.95 -1476.36,-3534.14 -1476.36,-3140.44 -1476.36,-2864.85 cw(c7311.44,-3944.72) -1313.08,-1942.41 cw(c3918.93,-3341.98) -645.19,-426.24 cw(c298.66,-974.06) -512.56,-244.08 cw(c175.46,-757.6) -401.59,-121.92 cw(c543.89,-896.94) -242,39.53 cw(c485.96,-656.22) 835.98,287.96 cw(c52.22,-1175.58) 1685.24,-876.42 cw(c-3527.58,-2337.08) 1819.32,-3184.24 cw(c-4531.03,-1475.13) 1426.2,-4260.7 ccw(c3666.75,-5584.92) 1074.31,-5814.86 ccw(c5587.75,-5713.61) 1240.88,-6932.71 ccw(c4856.21,-6611.73) 1331.49,-7477.73 cw(c-856.55,-8039.02) 1394.08,-7846.04 cw(c-1473.17,-8345.15) 1304.04,-9215.4 ; -1243,-5582.02 cw(c-7729.36,-7029.93) -1095.9,-6621.99 ; -1096,-6622 cw(c-1126.66,-6623.66) -1125,-6654.33 -6749.02,-6654.33 -6749.02,-6664.33 -6749.02,-7924.29 -6749.02,-7933.46 -1031.5,-7933.46 cw(c-1029.84,-7969.22) -994.08,-7967.56 cw(c-12790.9,-8516.5) -984.15,-8257.65 ccw(c1754.38,-8132.87) -718.36,-9316.36 ccw(c255.92,-8809.73) 531.51,-9872.72 ccw(c65,-8526.05) 1274.97,-9279.14 ccw(c1117.99,-9169.77) 1303.8,-9215.35
Mechanical 15:
  lines w9: -6748.9,-7933.39 -6547.24,-7933.39 -6547.24,-6654.41 -6748.9,-6654.41 -6748.9,-7933.39